# Altium PCB TailBoard.PcbDoc
Units mm, origin at the board's own origin, x right, y up, seen from the top; angles counter-clockwise.
Board outline 65.79 x 56.39 mm, 2 copper layers (Top Layer, Bottom Layer); 7 components, 10 nets, 42 pads, 0 vias.
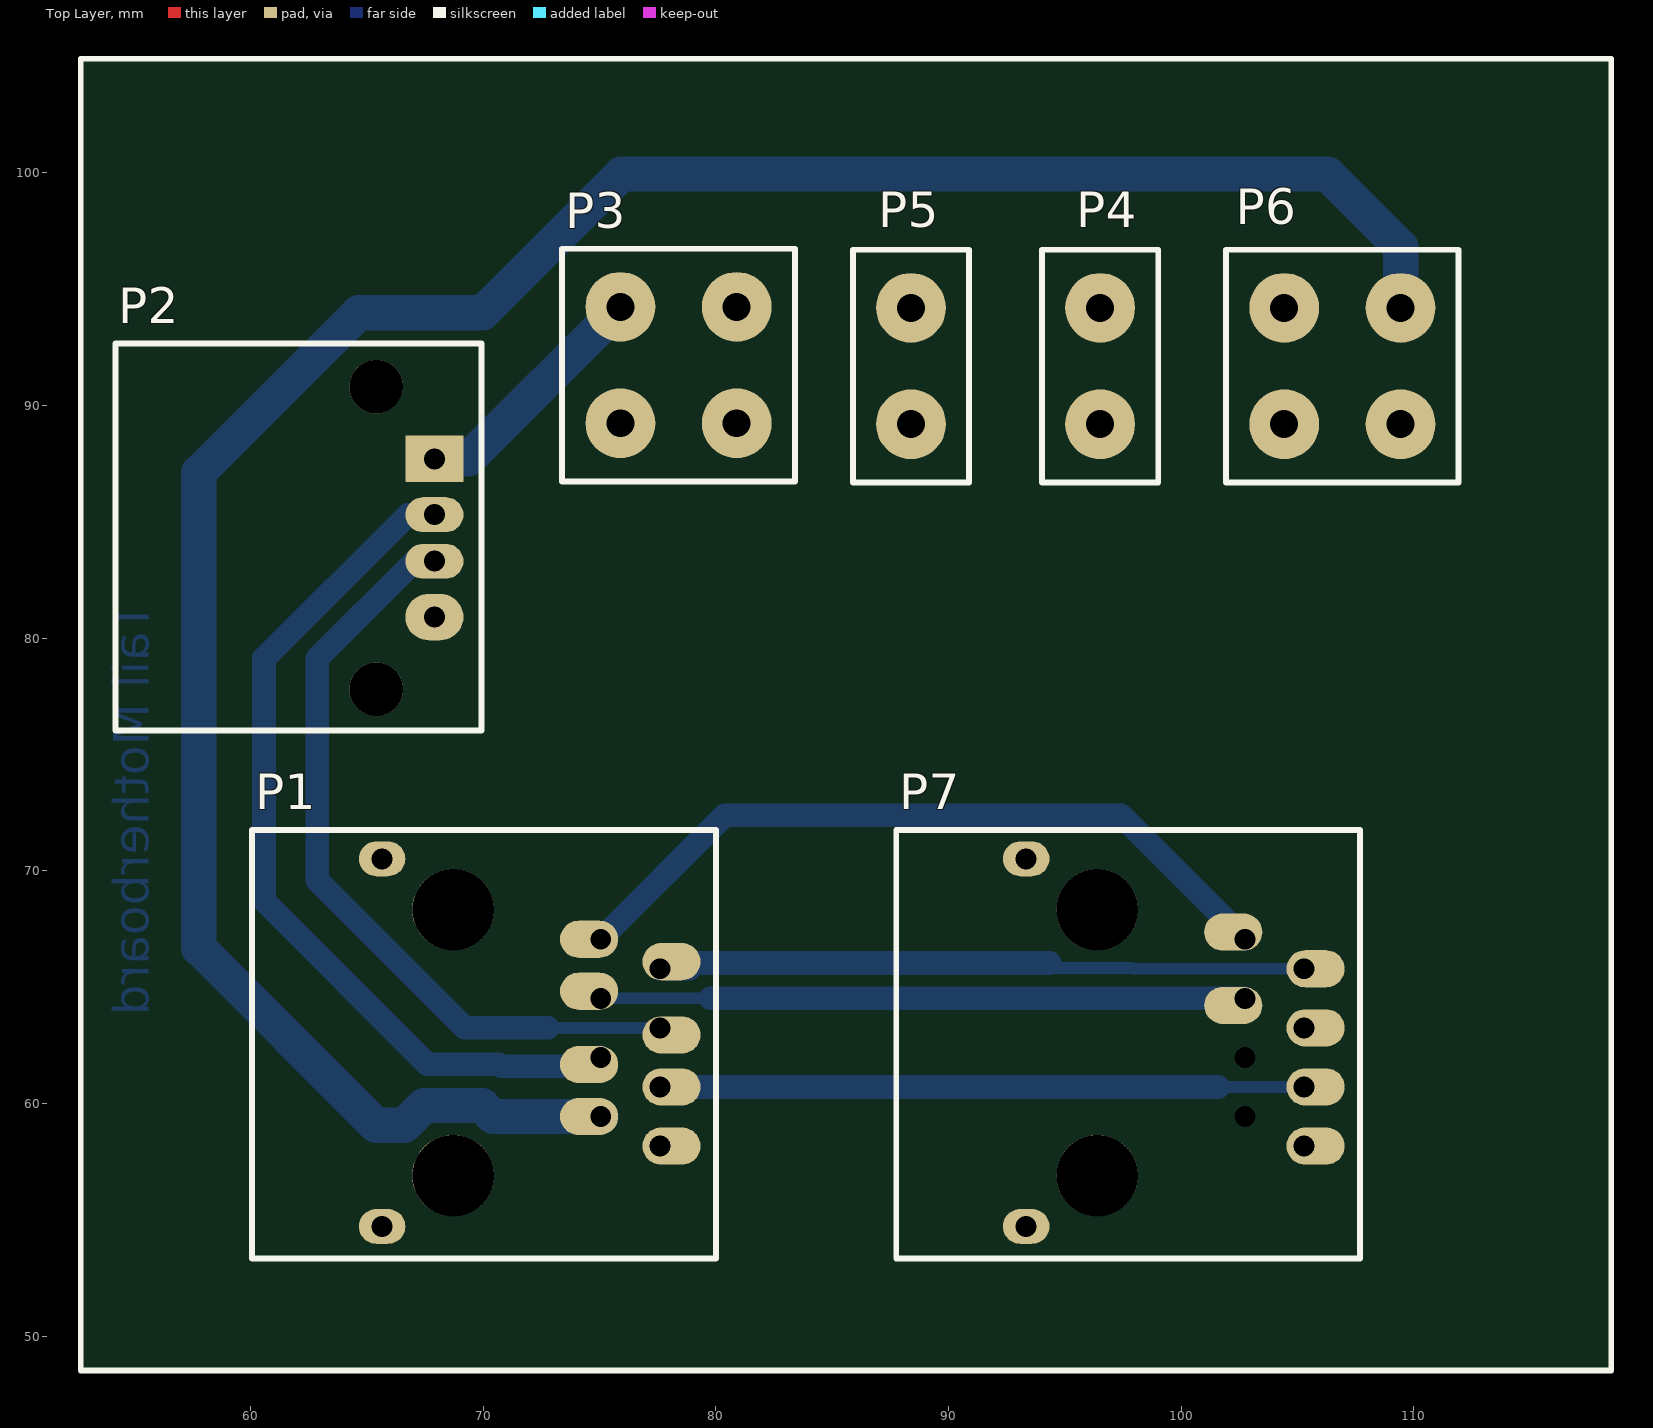
[diagram p0: Top Layer view]
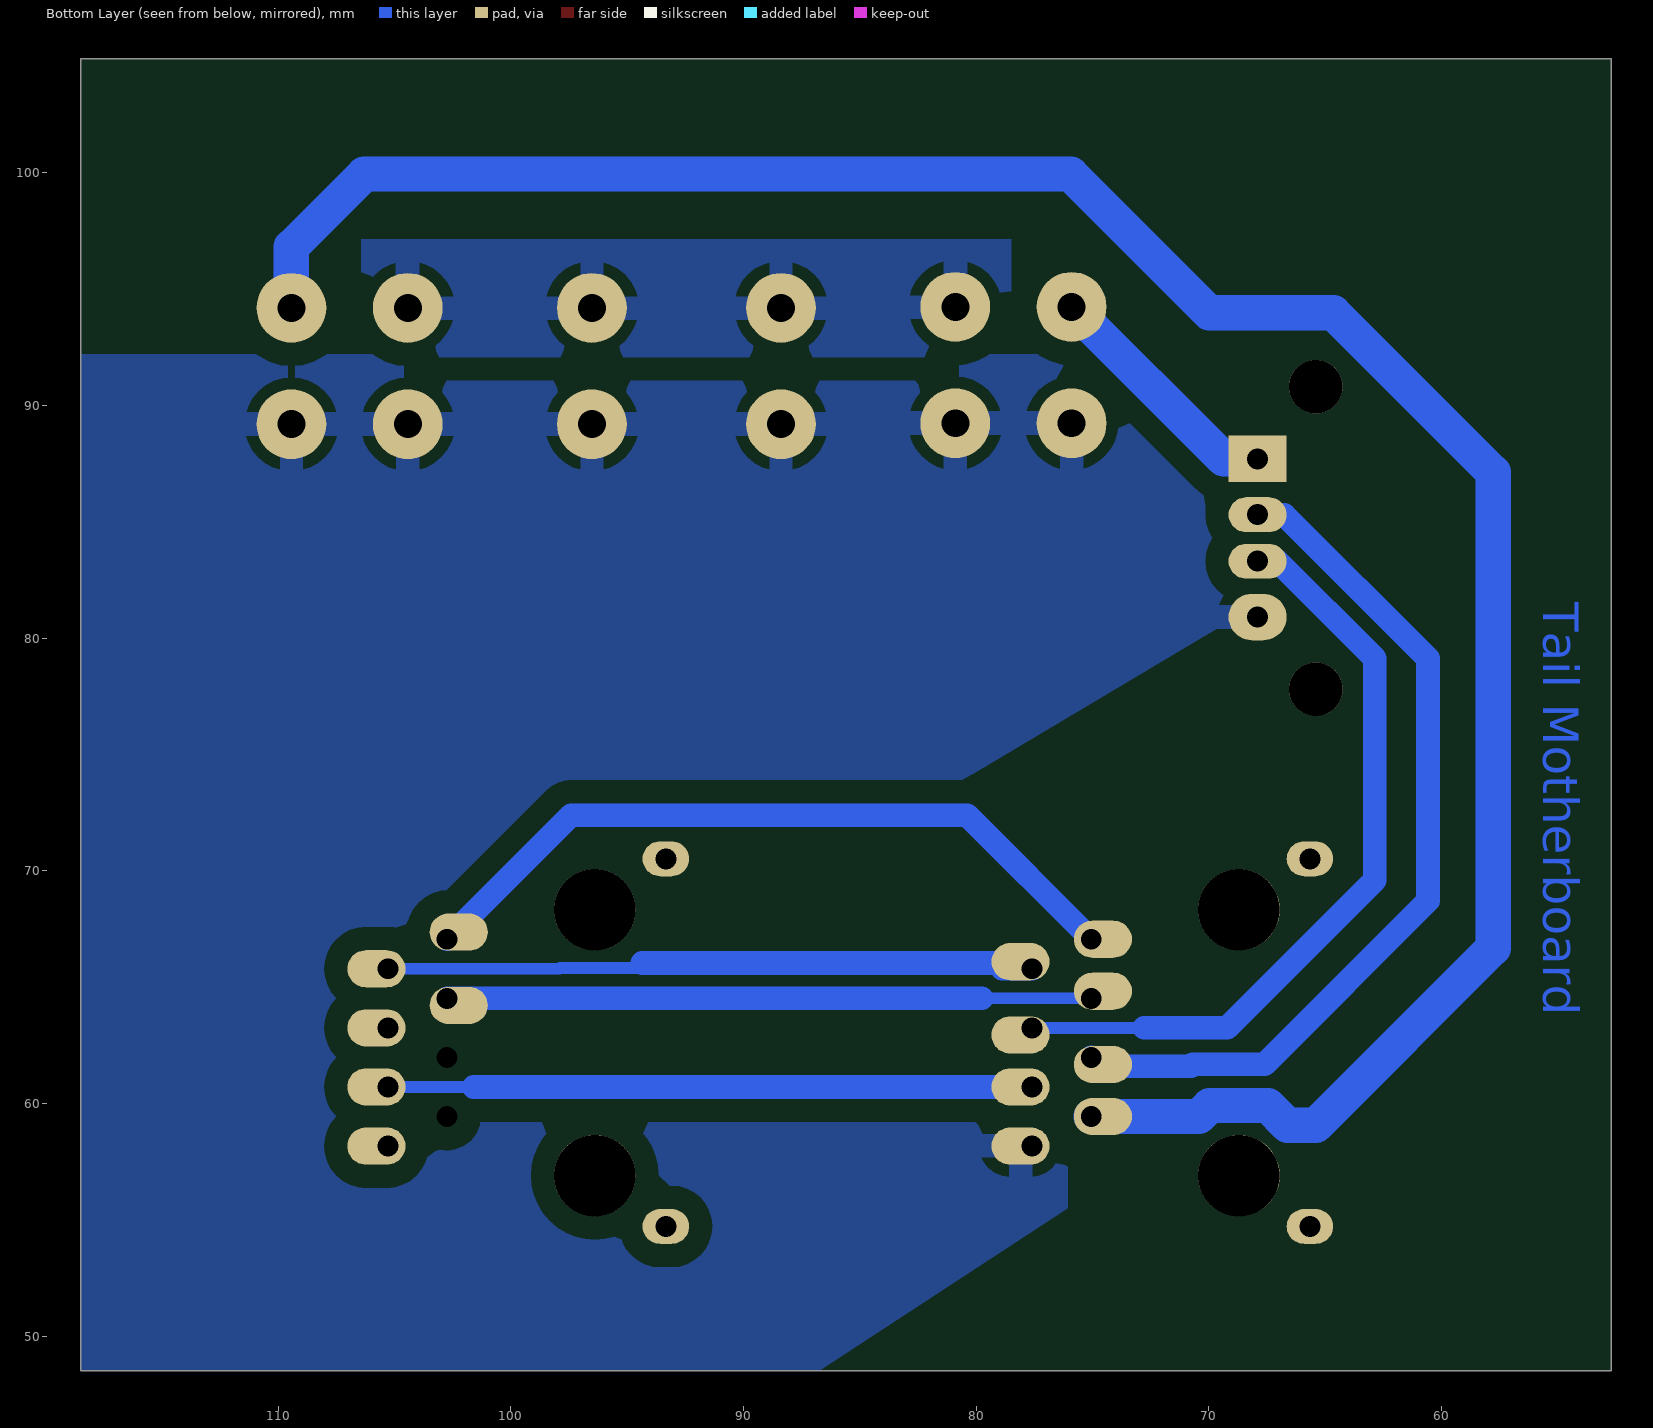
[diagram p1: Bottom Layer view, seen from below]

## Layer stack, top to bottom
Top Solder: solder mask 0.0102, Solder Resist, Dk 3.5
Top Layer: signal copper 0.0356
Dielectric 1: dielectric 0.32, FR-4, Dk 4.8
Bottom Layer: signal copper 0.0356
Bottom Solder: solder mask 0.0102, Solder Resist, Dk 3.5

## Board outline
52.705,48.514 118.491,48.514 118.491,104.902 52.705,104.902

## Design rules (kind name [scope] priority, off if disabled: settings)
Clearance [All] p1: gap=0.5 except(1: Arc-Poly Track-Poly SMDPad-Poly THPad-Poly Via-Poly Fill-Poly Poly-Poly Poly-Region)
PolygonConnect [All] p1: connectstyle=Relief reliefconductorwidth=1.016 reliefentries=4 polygonreliefangle="90 Angle" airgapwidth=0.508
RoutingVias [All] p1: holewidth=0.711 width=1.27 viastyle="Through Hole" minholewidth=0.711 minwidth=1.27 maxholewidth=0.711 maxwidth=1.27
SolderMaskExpansion [All] p1: expansion=0.102
Width [All] p1: maxlimit=1.524 minlimit=0.381 preferedwidth=0.508
30 further rules are at their usual default settings.

## Classes and differential pairs
component class TailBoard: P1 P3 P4 P5 P6 P7

## Components (designator, comment, footprint, x,y, rotation, side; value= is the part's Value field where it differs from the comment)
P1 "RJ45 PUE - Head" RJ45#1 77.597,65.786 r270 top
P2 "USB - Data card" USB_Female 67.905,87.705 r270 top
P3 "Buck Conveter" PWR_HEADER 78.399,91.734 r180 top
P4 "Charger" "PWR_HEADER - duplicate" 96.52,91.694 r270 top
P5 "12V Battery" "PWR_HEADER - duplicate" 88.392,91.694 r270 top
P6 "Boost Conveter" PWR_HEADER 106.934,91.694 r180 top
P7 "RJ45 Ethernet" RJ45#2 105.283,65.786 r270 top

## Footprints (in the part's own frame and the unit in brackets; to place one, negate y for a bottom-side part, rotate by r counter-clockwise, add the part's x,y. Pads: shape width x height; smd on the part's side, far side on the other; paste and mask are expansions set on the pad)
PWR_HEADER [mm] "4 port power header"
  round 3 hole 1.2: 1(-2.5,2.5) 2(2.5,2.5) 3(-2.5,-2.5) 4(2.5,-2.5)
  silkscreen extent -5,-5 5,5
"PWR_HEADER - duplicate" [mm] "2 port power header"
  round 3 hole 1.2: 1(-2.5,0) 2(2.5,0)
  silkscreen extent -5,-2.5 5,2.5
RJ45#1 [mm]
  oval 1.6x2.5 hole 0.9 copper offset 0,0.5: 1(7.62,0) 3(5.08,0)
  oval 1.6x2.5 hole 0.9 copper offset 0,-0.5: 2(6.35,-2.54) 8(-1.27,-2.54)
  oval 1.6x2.5 hole 0.9 copper offset 0.305,-0.5: 4(3.81,-2.54)
  oval 1.6x2.5 hole 0.9 copper offset 0.305,0.5: 5(2.54,0)
  oval 1.6x2.5 hole 0.9 copper offset -0.305,-0.5: 6(1.27,-2.54)
  oval 1.6x2.5 hole 0.9 copper offset -0.305,0.5: 7(0,0)
  round 3.5 hole 3.5: 9(-2.54,-8.89) 10(8.89,-8.89)
  oval 1.5x2 hole 0.9: 11(-4.725,-11.94) 12(11.075,-11.94)
  silkscreen extent -5.97,-17.53 12.45,2.41
RJ45#2 [mm]
  oval 1.6x2.5 hole 0.9 copper offset 0,0.5: 1(7.62,0) 3(5.08,0) 5(2.54,0) 7(0,0)
  round 0.508 hole 0.9: 2(6.35,-2.54) 4(3.81,-2.54)
  oval 1.6x2.5 hole 0.9 copper offset 0.305,-0.5: 6(1.27,-2.54)
  oval 1.6x2.5 hole 0.9 copper offset -0.305,-0.5: 8(-1.27,-2.54)
  round 3.5 hole 3.5: 9(-2.54,-8.89) 10(8.89,-8.89)
  oval 1.5x2 hole 0.9: 11(-4.725,-11.94) 12(11.075,-11.94)
  silkscreen extent -5.97,-17.53 12.45,2.41
USB_Female [mm]
  rect 2x2.5 hole 0.9: 1(0,0)
  oval 1.5x2.5 hole 0.9: 2(2.4,0) 3(4.4,0)
  oval 2x2.5 hole 0.9: 4(6.8,0)
  round 2.3 hole 2.3: 5(-3.1,-2.5) 5(9.9,-2.5)
  silkscreen extent -4.95,-13.72 11.68,2.03

## Part data
P1 P7: library part "Header 8", "Header, 8-Pin"
P2: library part "Header 4", "Header, 4-Pin"
P3 P6: library part "Header 2X2", "Header, 2-Pin, Dual row"
P4 P5: library part "Header 2", "Header, 2-Pin"

## Nets (pads, with @x,y where several pads share a name; then routed paths per layer and width w, separated by ;. In a path a pad name is that pad's centre, name@x,y a point inside that pad or via, vN(x,y) a via of type N, cw(c..) or ccw(c..) an arc to the next point about the centre after c; other vN are vias at no path point)
BOOST_OUT: P1.2 P6.3 | length 102.3
  Bottom Layer w1.524: P1.2 70.427,59.436 69.955,59.908 67.459,59.908 66.606,59.055 65.405,59.055 57.785,66.675 57.785,87.122 64.643,93.98 69.977,93.98 75.946,99.949 106.299,99.949 109.434,96.814 P6.3
D+: P1.5 P2.3 | length 33.7
  Bottom Layer w0.508: P2.3@67.049,83.305 P2.3 ; 72.771,63.246 P1.5
  Bottom Layer w1.016: P2.3@67.049,83.305 62.865,79.121 62.865,69.596 69.215,63.246 72.771,63.246
D-: P1.4 P2.2 | length 37.9
  Bottom Layer w0.508: P2.2@66.763,85.305 P2.2
  Bottom Layer w1.016: P2.2@66.763,85.305 60.579,79.121 60.579,68.707 67.608,61.678 70.688,61.678 70.771,61.595 74.676,61.595 P1.4
GND: P1.1 P2.4 P3.1 P3.2 P4.2 P5.2 P6.1 P6.2
RX+: P1.6 P7.6 | length 27.7
  Bottom Layer w0.508: P1.6 79.756,64.516
  Bottom Layer w1.016: 79.756,64.516 P7.6
RX-: P1.3 P7.3 | length 27.7
  Bottom Layer w0.508: 101.6,60.706 P7.3
  Bottom Layer w1.016: P1.3 101.6,60.706
TX+: P1.8 P7.8 | length 32.1
  Bottom Layer w1.016: P1.8 80.391,72.39 97.409,72.39 P7.8
TX-: P1.7 P7.7 | length 27.9
  Bottom Layer w0.508: 94.353,66.032 94.563,65.822 97.881,65.822 97.917,65.786 P7.7
  Bottom Layer w1.016: P1.7 78.882,65.786 79.128,66.032 94.353,66.032
VCC: P2.1 P3.4 | length 10.7
  Bottom Layer w1.524: P2.1 69.37,87.705 P3.4
VIN: P3.3 P4.1 P5.1 P6.4
pads on no net: P1.9 P1.10 P1.11 P1.12 P2.5 P7.1 P7.2 P7.4 P7.5 P7.9 P7.10 P7.11 P7.12

## Polygon pours and split planes (outlines as drawn)
VIN on Bottom Layer "Bottom Layer-No Net" (solid, remove dead copper, pour order 2): 78.486,97.155 78.486,92.075 106.426,92.075 106.426,97.155
GND on Bottom Layer "Bottom Layer-No Net" (solid, remove dead copper, pour order 6): 66.675,82.169 69.469,82.169 69.596,82.296 69.85,82.55 69.85,84.455 69.85,85.979 74.93,91.059 76.073,92.202 77.851,92.202 118.491,92.202 118.491,48.514 86.741,48.514 76.073,55.499 76.073,58.166 77.851,58.166 80.137,74.168

## Other copper
Bottom Layer:
  text "Tail Motherboard" at 55.626,81.534 h1.52 r90

## Silkscreen, mask and mechanical layers (free items; w line width, h text height)
Top Overlay:
  the board outline again, w0.254